# Altium PCB AD9959-pcb.PcbDoc (part 2 of 2)
Units mil, origin at the board's own origin, x right, y up, seen from the top; angles counter-clockwise.
Board outline 3551.25 x 2369.11 mil, 2 copper layers (Top Layer, Bottom Layer); 146 components, 90 nets, 422 pads, 640 vias.
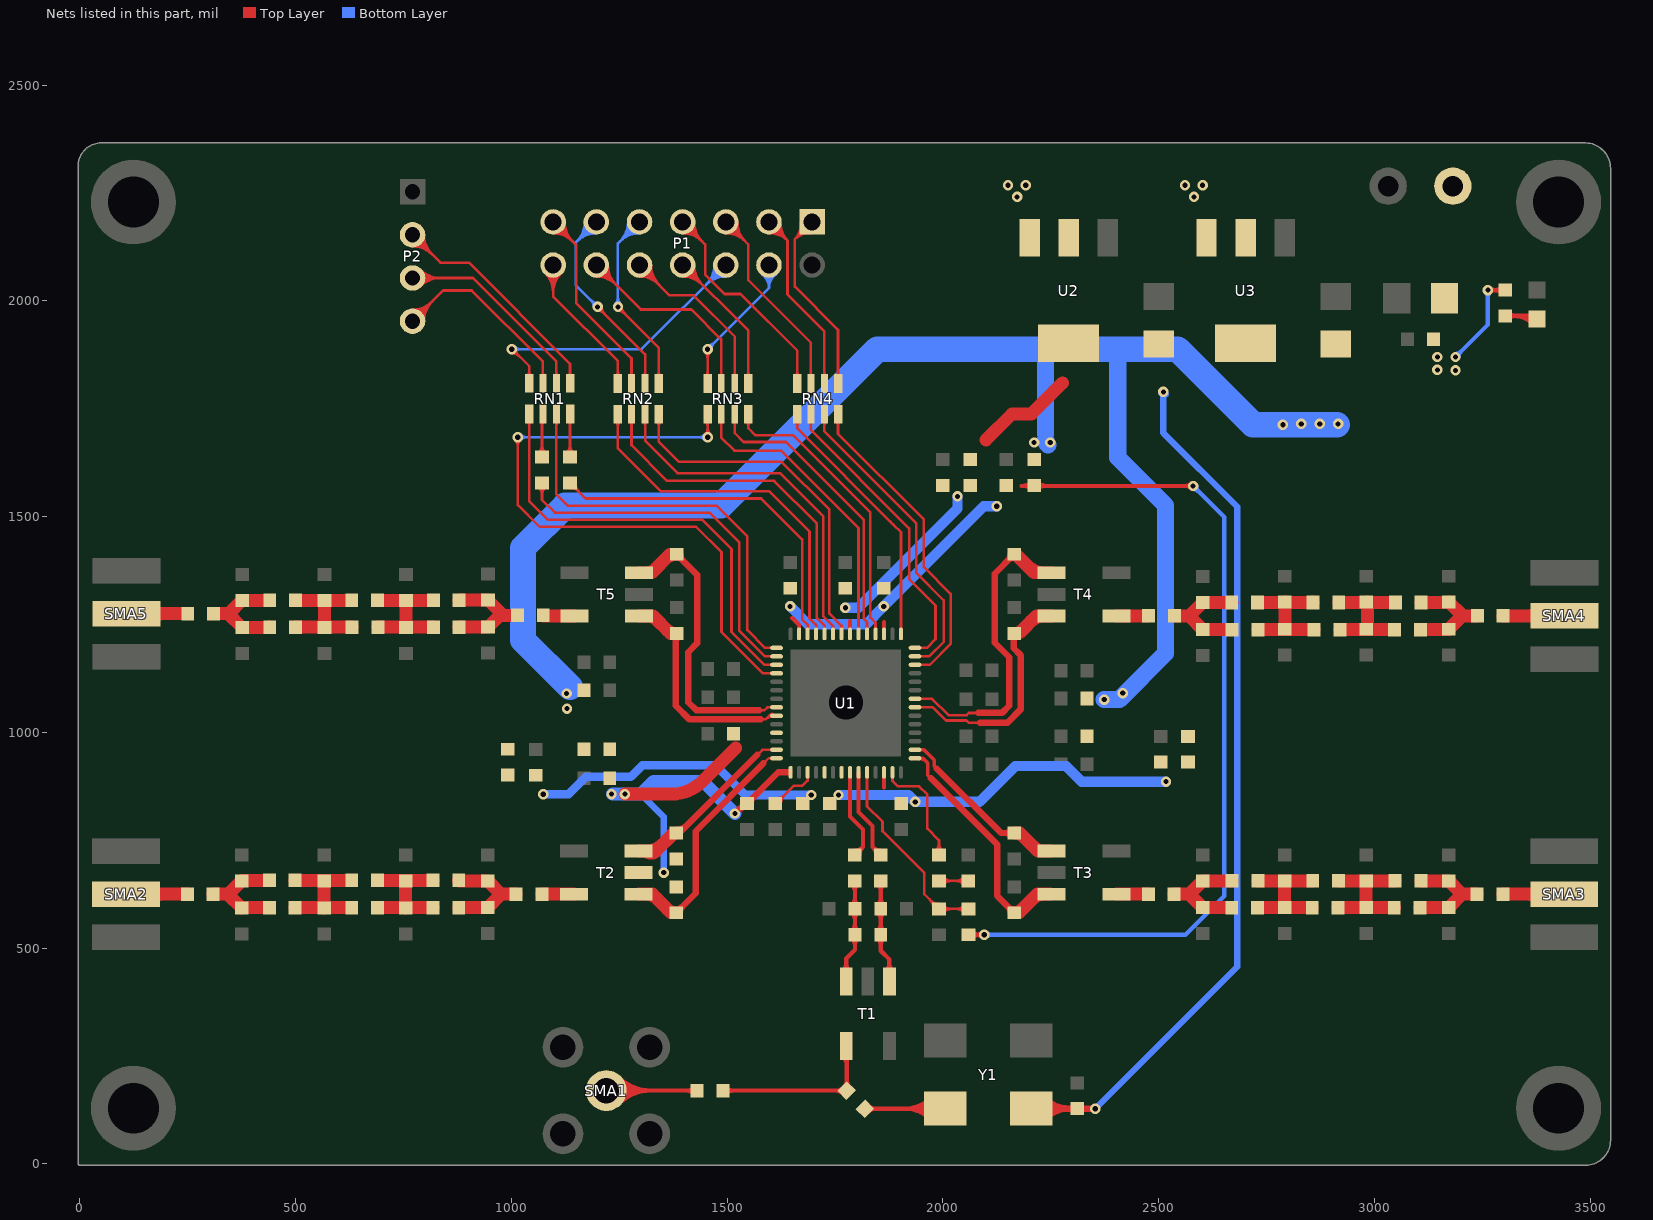
[diagram p2: the nets of this part, all layers, seen from the top]

## Via types
v1: diameter 24, hole 12, Top Layer to Bottom Layer, tented both sides, 640 vias

## Nets (pads, with @x,y where several pads share a name; then routed paths per layer and width w, separated by ;. In a path a pad name is that pad's centre, name@x,y a point inside that pad or via, vN(x,y) a via of type N, cw(c..) or ccw(c..) an arc to the next point about the centre after c; other vN are vias at no path point) (continued)
AVDD3: C68.1 C69.1 C76.1 R23.1 R31.1 R32.1 T2.2 U1.11 U1.15 | length 1049.8
  Top Layer w10: U1.15@1642.43,907.57 U1.15@1647.05,907.57
  Top Layer w15: v1(1518,812) 1540.92,834.92 C69.1@1546,834.92 1618.65,907.57 U1.15@1642.43,907.57 ; v1@1525.15,819.15 cw(c1545.21,799.09) C69.1@1545.21,827.46 ; C69.1@1546.79,842.38 ccw(c1546.79,858.49) C69.1@1558.18,847.1 ; C69.1@1554.25,834.92 cw(c1574.16,834.92) C69.1@1560.08,849
  Top Layer w30: v1(1263,857) 1371.58,857 ccw(c1371.58,957) 1442.29,886.29 1520,964
  Bottom Layer w15: v1(1232,857) 1234,857 v1@1234,858 ; 1300,857 1353,804 v1(1353,675)
  Bottom Layer w30: v1@1234,857 v1(1263,857) 1300,857 1329,886 1444,886 v1(1518,812)
BG_VDD: C67.1 C74.1 R19.1 U1.19 | length 677.5
  Bottom Layer w20: v1(1074,856.49) 1132.49,856.49 1173,897 1277,897 1304,924 1473,924 1542,855 v1(1695,855)
CH0_OUT: R25.2 T3.3 U1.30 | length 501.1
  Top Layer w8: U1.30@1935.43,959.73 1956.27,959.73 1980,936 1980,922 1986.07,915.93 ; R25.2@2165,766.84 R25.2@2178.16,766.84 ; T3.3@2248.26,725 T3.3@2252,725
  Top Layer w15: 1986.07,915.93 2135.16,766.84 R25.2@2165,766.84 ; R25.2@2158.94,761.57 ccw(c2146.2,748.83) 2146.2,766.84 ccw(c2146.2,784.85) R25.2@2158.94,772.12
  Top Layer w30: R25.2@2165.79,766.88 cw(c2165.79,737.11) 2186.84,758.16 ; R25.2@2178.16,766.84 2220,725 T3.3@2248.26,725 ; 2209.83,735.17 ccw(c2234.48,759.82) T3.3@2234.48,724.96
CH0_OUTN: R26.2 T3.1 U1.29 | length 703.4
  Top Layer w8: U1.29@1935.43,940.05 1953.95,940.05 1965,929 1965,901 1971.94,894.06 ; U1.29@1945.28,939.13 cw(c1945.28,915.95) 1961.66,932.34 ; U1.29@1945.51,939.16 cw(c1948.9,926.32) 1958.29,935.71 ; T3.1@2249.34,625 T3.1@2252,625
  Top Layer w15: 1971.94,894.06 2126.04,739.96 2126.04,621.04 R26.2@2165,582.08 ; R26.2@2150.92,596.16 cw(c2136.84,582.08) R26.2@2156.75,582.08 ; R26.2@2152.82,594.26 ccw(c2164.21,605.65) R26.2@2164.21,589.54
  Top Layer w30: R26.2@2165,582.08 2175.92,582.08 2218.84,625 T3.1@2249.34,625 ; R26.2@2165.79,582.04 ccw(c2165.79,606.41) 2183.02,589.18 ; 2207.85,614.01 cw(c2234.48,587.38) 2234.48,625.04 ccw(c2230.64,597.57) 2211.02,617.18
CH1_OUT: R27.2 T4.3 U1.36 | length 806.8
  Top Layer w6: U1.36@1935.43,1077.84 1975.16,1077.84 2013,1040 2055,1040 2060,1045 2082,1045 2079,1048
  Top Layer w15: 2082,1045 2137,1045 2154,1062 2154,1174 2120,1208 2120,1367.84 R27.2@2165,1412.84 ; R27.2@2150.92,1398.76 ccw(c2136.84,1412.84) R27.2@2156.75,1412.84 ; R27.2@2152.82,1400.66 cw(c2164.21,1389.27) R27.2@2164.21,1405.38
  Top Layer w30: R27.2@2165,1412.84 2169.16,1412.84 2212,1370 T4.3@2252,1370 ; 2196.17,1385.83 ccw(c2234.48,1424.14) T4.3@2234.48,1369.96
CH1_OUTN: R28.2 T4.1 U1.35 | length 681.3
  Top Layer w6: U1.35@1935.43,1058.16 1976.84,1058.16 2007.5,1027.5 2054.5,1027.5 2060,1022 2102,1022
  Top Layer w15: 2086,1022 2102,1022 2149,1022 2181,1054 2181,1178 2164,1195 2164,1217 2178,1231 R28.2@2178,1229.16 ; R28.2@2158.94,1223.88 cw(c2146.71,1211.66) 2164,1211.66 ; 2164,1210.63 cw(c2182.74,1210.63) R28.2@2169.49,1223.88
  Top Layer w30: R28.2@2165.79,1229.12 ccw(c2165.79,1254.06) 2183.42,1236.42 ; R28.2@2178,1231 2217,1270 T4.1@2252,1270 ; 2204.71,1257.71 cw(c2234.48,1227.93) 2234.48,1270.04 ccw(c2230.18,1239.34) 2208.26,1261.26
CH2_OUT: R29.2 T5.1 U1.8 | length 768.8
  Top Layer w6: 1575,1051 1586,1051 1593.16,1058.16 U1.8@1614.57,1058.16
  Top Layer w15: R29.2@1382.95,1412.84 1431,1364.79 1431,1207 1410,1186 1410,1070 1429,1051 1575,1051 ; R29.2@1383.74,1405.38 cw(c1383.74,1389.27) R29.2@1395.13,1400.66 ; R29.2@1391.2,1412.84 ccw(c1411.11,1412.84) R29.2@1397.03,1398.76
  Top Layer w30: T5.1@1295.95,1370 1325,1370 1367.84,1412.84 R29.2@1382.95,1412.84 ; T5.1@1313.47,1369.96 ccw(c1313.47,1397.7) 1333.09,1378.09 ; 1357.78,1402.78 cw(c1382.16,1378.41) R29.2@1382.16,1412.88
CH2_OUTN: R30.2 T5.3 U1.9 | length 653.7
  Top Layer w6: R30.2@1375.9,1222.1 1381,1227.21 R30.2@1382.95,1229.16 ; 1578,1030 1589,1030 1597.47,1038.47 U1.9@1614.57,1038.47 ; 1589.06,1030.07 cw(c1604.72,1014.41) U1.9@1604.72,1036.55 ; 1593.85,1034.85 cw(c1600.26,1028.44) U1.9@1603.94,1036.72 ; 1599.31,1040.31 cw(c1604.72,1034.89) U1.9@1604.72,1042.55
  Top Layer w15: R30.2@1376.89,1223.88 cw(c1366.96,1213.95) 1381,1213.95 ; 1381,1208.34 cw(c1402.98,1208.34) R30.2@1387.44,1223.88 ; R30.2@1381,1227.21 1381,1062 1413,1030 1543,1030 ; 1552,1030 1543,1030 ; 1578,1030 1543,1030
  Top Layer w30: T5.3@1295.95,1270 1328,1270 1368.84,1229.16 R30.2@1382.95,1229.16 ; T5.3@1313.47,1270.04 cw(c1313.47,1235.05) 1338.21,1259.79 ; 1359.49,1238.51 ccw(c1382.16,1261.18) R30.2@1382.16,1229.12
CH3_OUT: R31.2 T2.1 U1.13 | length 501.7
  Top Layer w6: 1570,948 1581.73,959.73 U1.13@1614.57,959.73
  Top Layer w15: R31.2@1382.08,766.84 1388.84,766.84 1570,948 ; R31.2@1382.87,774.3 ccw(c1382.87,806.74) 1405.8,783.8
  Top Layer w30: T2.1@1295.08,725 1335,725 ; T2.1@1312.57,724.97 ccw(c1323.77,736.23) 1335,725 ; T2.1@1312.6,724.96 ccw(c1312.6,778.95) 1350.77,740.77 ; R31.2@1375,765 1335,725
CH3_OUTN: R32.2 T2.3 U1.14 | length 634.9
  Top Layer w6: 1584,928 1596.05,940.05 U1.14@1614.57,940.05
  Top Layer w15: R32.2@1382.08,582.08 1427,627 1427,771 1584,928 ; R32.2@1382.87,589.54 ccw(c1382.87,605.65) R32.2@1394.26,594.26 ; R32.2@1390.33,582.08 cw(c1410.24,582.08) R32.2@1396.16,596.16
  Top Layer w30: T2.3@1295.08,625 1327,625 R32.2@1370,582 ; T2.3@1312.6,625.04 cw(c1312.6,590.37) 1337.12,614.88 ; 1361.95,590.05 ccw(c1381.29,609.39) R32.2@1381.29,582.04
CLK_MODE: R3.2 R4.2 U1.24 | length 603.1
  Top Layer w6: U1.24@1824.21,907.57 1824.21,828.79 1860,793 1860,771 1957,674 1957,624.92 R4.2@1991,590.92 R3.2@2059.46,590.92 ; 1969.24,612.68 cw(c1947.48,590.92) R4.2@1978.25,590.92 ; 1971.14,610.78 ccw(c1990.21,629.86) R4.2@1990.21,602.88 ; R4.2@1979.48,602.44 cw(c1967.96,590.92) R4.2@1984.25,590.92 ; R4.2@2000.24,582.46 cw(c2020.66,562.05) 2020.66,590.92 cw(c2020.66,619.8) R4.2@2000.24,599.38 ; R3.2@2050.22,582.46 ccw(c2029.8,562.05) 2029.8,590.92 ccw(c2029.8,619.8) R3.2@2050.22,599.38
CLK_VDD: C65.1 C66.1 C72.1 R17.1 U1.21 U1.26 | length 893
  Top Layer w10: 1863.58,872.42 U1.26@1863.58,907.57
  Bottom Layer w24: v1(1758,855) 1920,855 v1(1936,839) ; 1897.37,855 cw(c1897.37,800.37) v1(1936,839) ; v1(2517,886) 2485,886 2322,886 2286,922 2168,922 2085,839 v1(1936,839)
CSN: RN3.3 U1.47 | length 712
  Top Layer w6: RN3.3@1514.26,1720.34 cw(c1505.94,1712.02) 1517.71,1712.02 cw(c1529.48,1712.02) RN3.3@1521.16,1720.34 ; RN3.3@1517.71,1737.57 1517.71,1693.29 1538,1673 1636,1673 1817,1492 1817,1263 1824.21,1255.79 U1.47@1824.21,1228.43
CSNN: P1.10 RN3.6 | length 650.2
  Top Layer w6: P1.10@1297,2056.47 cw(c1297,1992.43) 1342.29,2037.71 cw(c1387.57,2083) P1.10@1323.53,2083 ; P1.10@1297,2062.47 cw(c1297,2012.91) 1332.04,2047.96 cw(c1367.09,2083) P1.10@1317.53,2083 ; P1.10@1297,2068.47 cw(c1297,2033.4) 1321.8,2058.2 cw(c1346.6,2083) P1.10@1311.53,2083 ; P1.10@1297,2083 1367,2013 1422,2013 1517.71,1917.29 RN3.6@1517.71,1808.43 ; RN3.6@1514.26,1825.66 ccw(c1505.94,1833.98) 1517.71,1833.98 ccw(c1529.48,1833.98) RN3.6@1521.16,1825.66
DVDD: C58.1 C59.1 C73.1 R3.1 R18.1 U1.45 U1.55 | length 2906.4
  Top Layer w10: 1651,1265 1666.73,1249.27 U1.55@1666.73,1228.43 ; U1.45@1863.58,1228.43 1863.58,1255.58 ; R3.1@2059.46,531.08 v1(2095.92,531.08) ; R3.1@2067.3,524.04 cw(c2084.3,507.03) 2084.3,531.08 cw(c2084.3,555.13) R3.1@2067.3,538.12 ; v1@2090.97,526.13 ccw(c2079.02,514.18) 2079.02,531.08 ccw(c2079.02,547.98) v1@2090.97,536.03 ; 2182,1571 v1(2580,1571) ; 2184.56,1571 ccw(c2184.56,1598.73) R18.1@2204.17,1579.12 ; 2189.77,1571 cw(c2189.77,1550.64) R18.1@2204.17,1565.04 ; R18.1@2219.83,1565.04 cw(c2234.23,1550.64) 2234.23,1571 ; R18.1@2219.83,1579.12 ccw(c2239.44,1598.73) 2239.44,1571 ; v1@2575.05,1566.05 ccw(c2563.1,1554.1) 2563.1,1571 ccw(c2563.1,1587.9) v1@2575.05,1575.95
  Bottom Layer w10: v1(2095.92,531.08) 2562.08,531.08 2652,621 2652,1499 v1(2580,1571) ; v1@2100.87,526.13 cw(c2112.82,514.18) 2112.82,531.08 cw(c2112.82,547.98) v1@2100.87,536.03 ; v1@2580,1564 cw(c2580,1547.1) 2591.95,1559.05 cw(c2603.9,1571) v1@2587,1571
  Bottom Layer w24: v1(1646,1292) 1687,1251 1822,1251 v1(1863,1292) 2095,1524 v1(2125,1524)
DVDD/IO: C57.1 C64.1 R24.1 U1.49 | length 413
  Top Layer w10: U1.49@1784.84,1228.43 1784.84,1258.16
  Bottom Layer w24: v1(1774,1289) 1776,1289 1804,1289 2034,1519 v1(2034,1547)
I/O-UPDATA: RN3.4 U1.46 | length 708.7
  Top Layer w6: RN3.4@1544.37,1720.92 cw(c1532.69,1709.24) 1549.2,1709.24 cw(c1565.72,1709.24) RN3.4@1554.04,1720.92 ; RN3.4@1549.2,1737.57 1549.2,1704.8 1565,1689 1653,1689 1832,1510 1832,1266 1843.9,1254.1 U1.46@1843.9,1228.43
NetC1_1: C1.1 R2.2 | length 158.3
  Top Layer w6: R2.2@1991,656 C1.1@2058.56,656 ; R2.2@2000.24,647.54 cw(c2020.66,627.12) 2020.66,656 cw(c2020.66,684.88) R2.2@2000.24,664.46 ; C1.1@2049.31,647.54 ccw(c2028.9,627.12) 2028.9,656 ccw(c2028.9,684.88) C1.1@2049.31,664.46
NetC3_1: C3.1 R5.1 R7.2 T1.1 | length 467.9
  Top Layer w10: R7.2@1848.96,523.25 cw(c1831.95,506.24) 1856,506.24 cw(c1880.05,506.24) R7.2@1863.04,523.25 ; R7.2@1848.96,538.91 ccw(c1831.95,555.91) 1856,555.91 ccw(c1880.05,555.91) R7.2@1863.04,538.91 ; R5.1@1848.96,583.09 cw(c1831.95,566.09) 1856,566.09 cw(c1880.05,566.09) R5.1@1863.04,583.09 ; R5.1@1848.96,598.75 ccw(c1831.95,615.76) 1856,615.76 ccw(c1880.05,615.76) R5.1@1863.04,598.75 ; C3.1@1848.96,648.96 cw(c1831.95,631.95) 1856,631.95 cw(c1880.05,631.95) C3.1@1863.04,648.96 ; C3.1@1856,656 R5.1@1856,590.92 R7.2@1856,531.08 1856,494 1876,474 T1.1@1876,423 ; T1.1@1868.96,447.56 ccw(c1851.95,464.57) 1876,464.57 ccw(c1900.05,464.57) T1.1@1883.04,447.56
NetC4_1: C4.1 R7.1 R9.2 T1.3 | length 468.1
  Top Layer w10: T1.3@1768.96,447.56 ccw(c1751.95,464.57) 1776,464.57 ccw(c1800.05,464.57) T1.3@1783.04,447.56 ; T1.3@1776,423 1776,476 1796.16,496.16 R7.1@1796.16,531.08 C4.1@1796.16,655.84 ; R9.2@1788.96,583.09 cw(c1771.57,565.71) 1796.16,565.71 ; R9.2@1788.96,598.75 ccw(c1771.57,616.14) 1796.16,616.14 ; C4.1@1788.96,648.96 cw(c1771.57,631.57) 1796.16,631.57 ; R7.1@1789.11,523.25 cw(c1772.11,506.24) 1796.16,506.24 cw(c1820.2,506.24) R7.1@1803.2,523.25 ; R7.1@1789.11,538.91 ccw(c1772.11,555.91) 1796.16,555.91 ccw(c1820.2,555.91) R7.1@1803.2,538.91 ; 1796.16,566.47 cw(c1819.67,566.47) R9.2@1803.04,583.09 ; 1796.16,615.38 ccw(c1819.67,615.38) R9.2@1803.04,598.75 ; 1796.16,632.33 cw(c1819.67,632.33) C4.1@1803.04,648.96
  Top Layer w15: C4.1@1796,656 C4.1@1796.16,655.84
NetC5_2: C5.2 C9.1 C13.1 L2.1 R12.2 | length 257.3
  Top Layer w30: L2.1@878,657 878.92,656.08 C13.1@945.08,656.08 976.16,625 ; C9.1@878.08,594 878.16,593.92 C5.2@945.08,593.92 976.16,625 ; R12.2@1011.08,625 976.16,625
NetC6_2: C6.2 C9.2 C12.1 C14.2 L1.1 L2.2 | length 319.5
  Top Layer w30: L1.1@690,594 C14.2@755.08,594 ; C12.1@690,657 L2.2@818.16,657 ; C14.2@755.08,593 C14.2@755.08,594 ; C6.2@755.08,656.08 C14.2@755.08,594 ; C9.2@818.24,594 C14.2@755.08,594
NetC7_2: C7.2 C10.1 C12.2 C15.2 L1.2 L3.1 | length 325.4
  Top Layer w30: C10.1@499,594 C15.2@566.08,594 ; L3.1@499,657 C12.2@630.16,657 ; C15.2@566.08,593 C15.2@566.08,594 ; C7.2@566.08,656.08 C15.2@566.08,594 ; L1.2@630.16,594 C15.2@566.08,594
NetC8_2: C8.2 C10.2 C11.1 C16.2 L3.2 | length 252.2
  Top Layer w30: C11.1@309,625 343.08,625 C8.2@375.08,593 376.08,594 C10.2@439.16,594 ; 344,625 C16.2@375.08,656.08 376,657 L3.2@439.16,657
NetC11_2: C11.2 SMA2.1 | length 197.2
  Top Layer w30: SMA2.1@107.08,625 C11.2@249.16,625 ; SMA2.1@166.56,614.73 cw(c191.36,589.93) 191.36,625 cw(c191.36,660.07) SMA2.1@166.56,635.27
NetC17_2: C17.2 C21.1 C25.1 L5.1 R13.2 | length 258.4
  Top Layer w30: R13.2@2536,625 2570.92,625 ; L5.1@2669.49,594 2669.41,593.92 C25.1@2602,593.92 2570.92,625 ; C21.1@2670,656 2669.92,656.08 C17.2@2602,656.08 2570.92,625
NetC18_2: C18.2 C21.2 C24.1 C26.2 L4.1 L5.2 | length 316.1
  Top Layer w30: L5.2@2729.33,594 C18.2@2792,594 ; C21.2@2729.84,656 C26.2@2792,656 ; C18.2@2792,593.92 C18.2@2792,594 ; C26.2@2792,656.08 C26.2@2792,656 ; C24.1@2856,594 C18.2@2792,594 ; L4.1@2857.08,656 C26.2@2792,656 ; C18.2@2792,594 C26.2@2792,656
NetC19_2: C19.2 C22.1 C24.2 C27.2 L4.2 L6.1 | length 323.6
  Top Layer w30: C24.2@2915.84,594 C19.2@2981,594 ; L4.2@2916.92,656 2980.92,656 C27.2@2981,656.08 ; C19.2@2981,593.92 C19.2@2981,594 ; L6.1@3046.08,594 C19.2@2981,594 ; C22.1@3048.08,656 2981.08,656 C27.2@2981,656.08 ; C19.2@2981,594 C27.2@2981,656.08
NetC20_2: C20.2 C22.2 C23.1 C28.2 L6.2 | length 253.1
  Top Layer w30: L6.2@3105.92,594 3171.92,594 C28.2@3172,593.92 3203.08,625 ; C22.2@3107.92,656 3171.92,656 C20.2@3172,656.08 3203.08,625 ; C23.1@3238.08,625 3203.08,625
NetC23_2: C23.2 SMA3.1 | length 197.2
  Top Layer w30: C23.2@3297.92,625 SMA3.1@3440,625 ; SMA3.1@3380.51,614.73 ccw(c3355.71,589.93) 3355.71,625 ccw(c3355.71,660.07) SMA3.1@3380.51,635.27
NetC29_2: C29.2 C33.1 C37.1 L8.1 R14.2 | length 257.1
  Top Layer w30: R14.2@2536.51,1270 2570.51,1270 C37.1@2602.51,1238 2668,1238 L8.1@2669,1239 ; 2571.43,1270 C29.2@2602.51,1301.08 2669.43,1301.08 C33.1@2669.51,1301
NetC30_2: C30.2 C33.2 C36.1 C38.2 L7.1 L8.2 | length 325.5
  Top Layer w30: C33.2@2729.35,1301 L7.1@2857.59,1301 L7.1@2856.59,1302 ; L8.2@2729.92,1238 C36.1@2860,1238 ; C38.2@2791.51,1301 C38.2@2792.51,1302 C30.2@2792.51,1238.92 C30.2@2791.59,1238
NetC31_2: C31.2 C34.1 C36.2 C39.2 L7.2 L9.1 | length 313.6
  Top Layer w30: L7.2@2917.43,1301 C34.1@3048.59,1301 ; C36.2@2919.84,1238 L9.1@3038.51,1238 ; C39.2@2982.51,1302 2983.51,1301 2983.51,1239.92 C31.2@2982.59,1239
NetC32_2: C32.2 C34.2 C35.1 C40.2 L9.2 | length 255.2
  Top Layer w30: L9.2@3106.43,1238 3171.59,1238 C40.2@3172.51,1238.92 3203.59,1270 3204.51,1270 ; C34.2@3108.43,1301 3171.51,1301 C32.2@3172.51,1302 3204.51,1270 ; C35.1@3238.59,1270 3204.51,1270
NetC35_2: C35.2 SMA4.1 | length 197.2
  Top Layer w30: C35.2@3298.43,1270 SMA4.1@3440.51,1270 ; SMA4.1@3381.03,1259.73 ccw(c3356.23,1234.93) 3356.23,1270 ccw(c3356.23,1305.07) SMA4.1@3381.03,1280.27
NetC41_2: C41.2 C45.1 C49.1 L11.1 R15.2 | length 264.7
  Top Layer w30: C45.1@878.95,1244 879.03,1243.92 C41.2@945.95,1243.92 973.03,1271 981.95,1271 ; L11.1@879,1306 880,1307 C49.1@945.95,1307 981.95,1271 ; R15.2@1014.08,1271 981.95,1271
NetC42_2: C42.2 C45.2 C48.1 C50.2 L10.1 L11.2 | length 320.5
  Top Layer w30: C48.1@690,1306 C42.2@755.95,1306 ; L10.1@690.87,1244 C50.2@755.95,1244 ; C50.2@755.95,1243 C50.2@755.95,1244 ; C42.2@755.95,1306.08 C42.2@755.95,1306 ; C45.2@819.11,1244 C50.2@755.95,1244 ; L11.2@819.16,1306 C42.2@755.95,1306 ; C50.2@755.95,1244 C42.2@755.95,1306
NetC43_2: C43.2 C46.1 C48.2 C51.2 L10.2 L12.1 | length 324.4
  Top Layer w30: C46.1@499.87,1244 C51.2@566.95,1244 ; L12.1@500,1306 C43.2@566.95,1306 ; C51.2@566.95,1243 C51.2@566.95,1244 ; C43.2@566.95,1306.08 C43.2@566.95,1306 ; C48.2@630.16,1306 C43.2@566.95,1306 ; L10.2@631.03,1244 C51.2@566.95,1244 ; C51.2@566.95,1244 C43.2@566.95,1306
NetC44_2: C44.2 C46.2 C47.1 C52.2 L12.2 | length 252
  Top Layer w30: C47.1@309.87,1275 343.95,1275 C44.2@375.95,1243 439.03,1243 C46.2@440.03,1244 ; 344.87,1275 C52.2@375.95,1306.08 440.08,1306.08 L12.2@440.16,1306
NetC47_2: C47.2 SMA5.1 | length 197.2
  Top Layer w30: SMA5.1@107.95,1275 C47.2@250.03,1275 ; SMA5.1@167.43,1264.73 cw(c192.23,1239.93) 192.23,1275 cw(c192.23,1310.07) SMA5.1@167.43,1285.27
NetD1_1: D1.1 R16.1 | length 189.1
  Top Layer w10: R16.1@3303,1965.16 D1.1@3369.38,1965.16 ; R16.1@3310.83,1958.11 cw(c3327.83,1941.11) 3327.83,1965.16 cw(c3327.83,1989.2) R16.1@3310.83,1972.2 ; 3323.87,1965.16 cw(c3323.87,1905.43) D1.1@3366.1,1947.66 ; 3348.01,1965.16 cw(c3348.01,1929.57) D1.1@3373.18,1954.73
  Top Layer w15: D1.1@3369.38,1965.16 D1.1@3376.49,1958.05
NetR1_2: R1.2 U1.17 | length 161.1
  Top Layer w6: R1.2@1612,834.92 1612.92,834.92 1654,876 1674,876 1686.42,888.42 U1.17@1686.42,907.57 ; R1.2@1612.79,846.88 ccw(c1612.79,876.08) 1633.43,855.43 ; R1.2@1624.75,834.92 cw(c1653.3,834.92) 1633.11,855.11
NetR2_1: R2.1 U1.27 | length 310.4
  Top Layer w6: U1.27@1883.27,907.57 1883.27,887.73 1896,875 1945,875 1964,856 1964,777 1991,750 R2.1@1991,715.84 ; R2.1@1982.54,724.3 ccw(c1962.12,744.72) 1991,744.72 ccw(c2019.88,744.72) R2.1@1999.46,724.3
NetR6_1: R6.1 Y1.3 | length 446.3
  Top Layer w10: R6.1@1819.63,128 Y1.3@2005,128 ; R6.1@1826.92,121.2 cw(c1843.34,104.78) 1843.34,128 ; R6.1@1826.92,135.28 ccw(c1844.5,152.87) 1844.5,128 ; Y1.3@1970.85,103.7 ccw(c1912.18,45.02) 1912.18,128 ccw(c1912.18,210.98) Y1.3@1970.85,152.3 ; Y1.3@1977.93,110.77 ccw(c1936.32,69.17) 1936.32,128 ccw(c1936.32,186.83) Y1.3@1977.93,145.23
  Top Layer w15: R6.1@1819.32,127.68 R6.1@1819.63,128
NetR6_2: R6.2 R8.2 T1.4 | length 541.5
  Top Layer w10: R8.2@1490,170 R6.2@1777,170 T1.4@1777,272 ; R8.2@1497.04,162.96 cw(c1514.05,145.95) 1514.05,170 cw(c1514.05,194.05) R8.2@1497.04,177.04 ; 1751.05,170 cw(c1751.05,144.05) R6.2@1769.4,162.4 ; 1753.74,170 ccw(c1753.74,192.15) R6.2@1769.4,176.49 ; T1.4@1768.96,248.44 cw(c1749.54,229.02) 1777,229.02 ; R6.2@1770.51,177.6 ccw(c1754.85,193.26) 1777,193.26 ; 1777,195.95 ccw(c1802.95,195.95) R6.2@1784.6,177.6 ; 1777,233.85 cw(c1797.63,233.85) T1.4@1783.04,248.44
  Top Layer w15: T1.4@1776,273 T1.4@1777,272
NetR8_1: R8.1 SMA1.1 | length 614.8
  Top Layer w10: SMA1.1@1220,170 R8.1@1430.16,170 ; SMA1.1@1235.73,154.27 cw(c1273.7,116.3) 1273.7,170 cw(c1273.7,223.7) SMA1.1@1235.73,185.73 ; SMA1.1@1242.8,147.2 cw(c1297.84,92.16) 1297.84,170 cw(c1297.84,247.84) SMA1.1@1242.8,192.8 ; SMA1.1@1249.87,140.13 cw(c1321.99,68.01) 1321.99,170 cw(c1321.99,271.99) SMA1.1@1249.87,199.87 ; R8.1@1423.11,162.96 ccw(c1406.11,145.95) 1406.11,170 ccw(c1406.11,194.05) R8.1@1423.11,177.04
NetR12_1: R12.1 T2.6 | length 74.2
  Top Layer w30: R12.1@1070.92,625 T2.6@1145.08,625
NetR13_1: R13.1 T3.4 | length 74.2
  Top Layer w30: T3.4@2402,625 R13.1@2476.16,625
NetR14_1: R14.1 T4.4 | length 74.7
  Top Layer w30: T4.4@2402,1270 R14.1@2476.67,1270
NetR15_1: R15.1 T5.6 | length 72.4
  Top Layer w30: R15.1@1073.92,1271 1074.92,1270 T5.6@1145.95,1270
P0: P1.1 RN4.5 | length 650.1
  Top Layer w6: P1.1@1670.58,2180.57 cw(c1623.74,2176.27) 1657,2143 ; P1.1@1676.56,2181.12 cw(c1640.31,2177.79) 1666.05,2152.05 cw(c1691.79,2126.31) P1.1@1695.12,2162.56 ; P1.1@1682.53,2181.67 cw(c1656.88,2179.31) 1675.1,2161.1 cw(c1693.31,2142.88) P1.1@1695.67,2168.53 ; P1.1@1694.57,2156.58 ccw(c1690.27,2109.74) 1657,2143 ; P1.1@1697,2183 1657,2143 ; RN4.5@1752.22,1825.08 ccw(c1740.54,1836.76) 1757.06,1836.76 ccw(c1773.58,1836.76) RN4.5@1761.9,1825.08 ; RN4.5@1757.06,1808.43 1757.06,1932.94 1657,2033 1657,2143
P1: P1.3 RN4.6 | length 661.9
  Top Layer w6: P1.3@1597,2183 1640,2140 ; P1.3@1597.54,2168.48 cw(c1598.69,2137.6) 1620.55,2159.45 cw(c1642.4,2181.31) P1.3@1611.52,2182.46 ; P1.3@1597.77,2162.49 cw(c1599.39,2118.85) 1630.27,2149.73 cw(c1661.15,2180.6) P1.3@1617.51,2182.23 ; P1.3@1597.99,2156.49 cw(c1600.09,2100.1) 1640,2140 ; P1.3@1623.51,2182.01 ccw(c1679.9,2179.9) 1640,2140 ; RN4.6@1722.12,1825.66 ccw(c1713.8,1833.98) 1725.56,1833.98 ccw(c1737.33,1833.98) RN4.6@1729.01,1825.66 ; RN4.6@1725.56,1808.43 1725.56,1929.44 1640,2015 1640,2140
P2: P1.5 RN4.7 | length 708.2
  Top Layer w6: P1.5@1497,2156.47 cw(c1497,2092.43) 1542.29,2137.71 cw(c1587.57,2183) P1.5@1523.53,2183 ; P1.5@1497,2162.47 cw(c1497,2112.91) 1532.04,2147.96 cw(c1567.09,2183) P1.5@1517.53,2183 ; P1.5@1497,2168.47 cw(c1497,2133.4) 1521.8,2158.2 cw(c1546.6,2183) P1.5@1511.53,2183 ; P1.5@1497,2183 1549,2131 1549,2048 1694.07,1902.93 RN4.7@1694.07,1808.43 ; RN4.7@1690.62,1825.66 ccw(c1682.3,1833.98) 1694.07,1833.98 ccw(c1705.83,1833.98) RN4.7@1697.51,1825.66
P3: P1.7 RN4.8 | length 765.7
  Top Layer w6: P1.7@1397,2156.47 cw(c1397,2092.43) 1442.29,2137.71 cw(c1487.57,2183) P1.7@1423.53,2183 ; P1.7@1397,2162.47 cw(c1397,2112.91) 1432.04,2147.96 cw(c1467.09,2183) P1.7@1417.53,2183 ; P1.7@1397,2168.47 cw(c1397,2133.4) 1421.8,2158.2 cw(c1446.6,2183) P1.7@1411.53,2183 ; P1.7@1397,2183 1449,2131 1449,2061 1494,2016 1531,2016 1662.57,1884.43 RN4.8@1662.57,1808.43 ; RN4.8@1657.73,1825.08 ccw(c1646.05,1836.76) 1662.57,1836.76 ccw(c1679.09,1836.76) RN4.8@1667.41,1825.08
P-0: RN4.4 U1.40 | length 769.2
  Top Layer w6: RN4.4@1752.22,1720.92 cw(c1740.54,1709.24) 1757.06,1709.24 cw(c1773.58,1709.24) RN4.4@1761.9,1720.92 ; RN4.4@1757.06,1737.57 1757.06,1691.94 1956,1493 1956,1383 2018,1321 2018,1205 1969.58,1156.58 U1.40@1935.43,1156.58
P-1: RN4.3 U1.41 | length 741.1
  Top Layer w6: RN4.3@1722.12,1720.34 cw(c1713.8,1712.02) 1725.56,1712.02 cw(c1737.33,1712.02) RN4.3@1729.01,1720.34 ; RN4.3@1725.56,1737.57 1725.56,1697.44 1938,1485 1938,1370 2002,1306 2002,1210 1968.27,1176.27 U1.41@1935.43,1176.27
P-2: RN4.2 U1.42 | length 715.6
  Top Layer w6: RN4.2@1690.62,1720.34 cw(c1682.3,1712.02) 1694.07,1712.02 cw(c1705.83,1712.02) RN4.2@1697.51,1720.34 ; RN4.2@1694.07,1737.57 1694.07,1700.93 1922,1473 1922,1355 1983,1294 1983,1216 1962.95,1195.95 U1.42@1935.43,1195.95
P-3: RN4.1 U1.43 | length 646
  Top Layer w6: RN4.1@1657.73,1720.92 cw(c1646.05,1709.24) 1662.57,1709.24 cw(c1679.09,1709.24) RN4.1@1667.41,1720.92 ; RN4.1@1662.57,1737.57 1662.57,1704.43 1886,1481 ; 1878,1489 1886,1481 ; U1.43@1902.95,1228.43 1902.95,1464.05 1886,1481
PD_CTL: P1.4 RN3.8 | length 558.4
  Top Layer w6: v1@1448.35,1881.35 cw(c1432.99,1865.99) 1454.72,1865.99 cw(c1476.44,1865.99) v1@1461.08,1881.35 ; RN3.8@1449.88,1825.08 ccw(c1438.2,1836.76) 1454.72,1836.76 ccw(c1471.24,1836.76) RN3.8@1459.55,1825.08 ; RN3.8@1454.72,1808.43 v1(1454.72,1887.72)
  Bottom Layer w6: v1(1454.72,1887.72) 1597,2030 ; v1@1454.72,1896.72 ccw(c1454.72,1918.44) 1470.08,1903.08 ccw(c1485.44,1887.72) v1@1463.72,1887.72 ; P1.4@1581.1,2061.76 cw(c1557.32,2030) 1597,2030 ; P1.4@1584.7,2066.57 cw(c1566.3,2041.99) 1597,2041.99 cw(c1627.7,2041.99) P1.4@1609.3,2066.57 ; P1.4@1597,2083 1597,2030 ; P1.4@1612.9,2061.76 ccw(c1636.68,2030) 1597,2030
PWR_DWN_CTL: RN3.1 U1.4 | length 1690.3
  Top Layer w6: v1@1008.64,1677.64 cw(c993.27,1662.27) 1015,1662.27 cw(c1036.73,1662.27) v1@1021.36,1677.64 ; v1@1015,1692 v1(1015,1684) 1015,1527 1065.43,1476.57 1428.43,1476.57 1487,1418 1487,1233 1583.1,1136.9 U1.4@1614.57,1136.9 ; v1@1448.64,1690.36 ccw(c1433.96,1705.04) 1454.72,1705.04 ; RN3.1@1449.88,1720.92 cw(c1438.2,1709.24) 1454.72,1709.24 cw(c1471.24,1709.24) RN3.1@1459.55,1720.92 ; v1@1454.72,1684.28 RN3.1@1454.72,1737.57 ; 1454.72,1706.41 ccw(c1477.41,1706.41) v1@1461.36,1690.36
  Bottom Layer w6: v1(1015,1684) v1(1455,1684) ; v1@1021.36,1677.64 cw(c1036.73,1662.27) 1036.73,1684 cw(c1036.73,1705.73) v1@1021.36,1690.36 ; v1@1448.64,1677.64 ccw(c1433.27,1662.27) 1433.27,1684 ccw(c1433.27,1705.73) v1@1448.64,1690.36
REF_CLK: C3.2 U1.23 | length 250.8
  Top Layer w10: U1.23@1804.53,907.57 1804.53,815.47 1836.84,783.16 1836.84,735 C3.2@1856,715.84 ; 1837.65,734.19 cw(c1819.3,715.84) C3.2@1845.25,715.84 ; 1839.55,732.29 ccw(c1855.21,747.95) C3.2@1855.21,725.8
REF_CLKN: C4.2 U1.22 | length 249.9
  Top Layer w10: U1.22@1784.84,907.57 1784.84,805.16 1815,775 1815,734.84 C4.2@1796,715.84 ; C4.2@1796.79,725.8 ccw(c1796.79,747.95) 1812.45,732.29 ; C4.2@1806.75,715.84 cw(c1832.7,715.84) 1814.35,734.19
RESET: RN1.1 U1.3 | length 1070.9
  Top Layer w6: RN1.1@1036.67,1721.35 cw(c1024.99,1709.67) 1041.51,1709.67 cw(c1058.03,1709.67) RN1.1@1046.35,1721.35 ; RN1.1@1041.51,1738 1041.51,1535.49 1084.07,1492.93 1442.07,1492.93 1510.13,1424.87 1510.13,1232.87 1586.42,1156.58 U1.3@1614.57,1156.58
RST: P1.6 RN1.8 | length 1001.4
  Top Layer w6: v1@1001,1879 cw(c1001,1854.86) 1018.07,1871.93 ; v1@1001,1889 1041.51,1848.49 RN1.8@1041.51,1808.87 ; v1@1010,1888 ccw(c1029.31,1888) 1015.66,1874.34 ; RN1.8@1036.67,1825.52 ccw(c1024.99,1837.2) 1041.51,1837.2 ccw(c1058.03,1837.2) RN1.8@1046.35,1825.52
  Bottom Layer w6: v1(1001,1888) 1302,1888 P1.6@1497,2083 ; v1@1007.36,1881.64 cw(c1022.73,1866.27) 1022.73,1888 cw(c1022.73,1909.73) v1@1007.36,1894.36 ; P1.6@1470.47,2083 cw(c1406.43,2083) 1451.71,2037.71 cw(c1497,1992.43) P1.6@1497,2056.47 ; P1.6@1476.47,2083 cw(c1426.91,2083) 1461.96,2047.96 cw(c1497,2012.91) P1.6@1497,2062.47 ; P1.6@1482.47,2083 cw(c1447.4,2083) 1472.2,2058.2 cw(c1497,2033.4) P1.6@1497,2068.47
S_CLK: P1.12 RN3.7 | length 714.9
  Top Layer w6: P1.12@1197,2056.47 cw(c1197,1992.43) 1242.29,2037.71 cw(c1287.57,2083) P1.12@1223.53,2083 ; P1.12@1197,2062.47 cw(c1197,2012.91) 1232.04,2047.96 cw(c1267.09,2083) P1.12@1217.53,2083 ; P1.12@1197,2068.47 cw(c1197,2033.4) 1221.8,2058.2 cw(c1246.6,2083) P1.12@1211.53,2083 ; P1.12@1197,2083 1300,1980 1417,1980 1486.21,1910.79 RN3.7@1486.21,1808.43 ; RN3.7@1482.77,1825.66 ccw(c1474.45,1833.98) 1486.21,1833.98 ccw(c1497.98,1833.98) RN3.7@1489.66,1825.66
SCLK: RN3.2 U1.48 | length 722.7
  Top Layer w6: RN3.2@1482.77,1720.34 cw(c1474.45,1712.02) 1486.21,1712.02 cw(c1497.98,1712.02) RN3.2@1489.66,1720.34 ; RN3.2@1486.21,1737.57 1486.21,1683.79 1517,1653 1625,1653 1804.53,1473.47 U1.48@1804.53,1228.43
SDIO-0: P1.9 RN2.5 | length 762.1
  Top Layer w6: v1@1247,1977 cw(c1247,1955.27) 1262.36,1970.64 cw(c1277.73,1986) v1@1256,1986 ; v1(1247,1986) 1341.35,1891.65 RN2.5@1341.35,1808.43 ; RN2.5@1336.51,1825.08 ccw(c1324.83,1836.76) 1341.35,1836.76 ccw(c1357.87,1836.76) RN2.5@1346.19,1825.08
  Bottom Layer w6: v1@1240.64,1992.36 ccw(c1225.27,2007.73) 1247,2007.73 ccw(c1268.73,2007.73) v1@1253.36,1992.36 ; v1(1247,1986) 1247,2133 P1.9@1297,2183 ; P1.9@1270.47,2183 cw(c1206.43,2183) 1251.71,2137.71 cw(c1297,2092.43) P1.9@1297,2156.47 ; P1.9@1276.47,2183 cw(c1226.91,2183) 1261.96,2147.96 cw(c1297,2112.91) P1.9@1297,2162.47 ; P1.9@1282.47,2183 cw(c1247.4,2183) 1272.2,2158.2 cw(c1297,2133.4) P1.9@1297,2168.47
SDIO-1: P1.11 RN2.6 | length 781.4
  Top Layer w6: v1@1200,1977 cw(c1200,1955.27) 1215.36,1970.64 cw(c1230.73,1986) v1@1209,1986 ; v1(1200,1986) 1309.85,1876.15 RN2.6@1309.85,1808.43 ; RN2.6@1306.41,1825.66 ccw(c1298.09,1833.98) 1309.85,1833.98 ccw(c1321.62,1833.98) RN2.6@1313.3,1825.66
  Bottom Layer w6: P1.11@1170.47,2183 cw(c1106.43,2183) 1151.71,2137.71 cw(c1197,2092.43) P1.11@1197,2156.47 ; P1.11@1176.47,2183 cw(c1126.91,2183) 1161.96,2147.96 cw(c1197,2112.91) P1.11@1197,2162.47 ; P1.11@1182.47,2183 cw(c1147.4,2183) 1172.2,2158.2 cw(c1197,2133.4) P1.11@1197,2168.47 ; v1@1191,1986 ccw(c1169.27,1986) 1184.64,2001.36 ccw(c1200,2016.73) v1@1200,1995 ; P1.11@1197,2183 1149,2135 1149,2037 v1(1200,1986)
SDIO-2: P1.13 RN2.7 | length 701.7
  Top Layer w6: P1.13@1097,2156.47 cw(c1097,2092.43) 1142.29,2137.71 cw(c1187.57,2183) P1.13@1123.53,2183 ; P1.13@1097,2162.47 cw(c1097,2112.91) 1132.04,2147.96 cw(c1167.09,2183) P1.13@1117.53,2183 ; P1.13@1097,2168.47 cw(c1097,2133.4) 1121.8,2158.2 cw(c1146.6,2183) P1.13@1111.53,2183 ; P1.13@1097,2183 1150,2130 1150,1995 1278.36,1866.64 RN2.7@1278.36,1808.43 ; RN2.7@1274.91,1825.66 ccw(c1266.59,1833.98) 1278.36,1833.98 ccw(c1290.13,1833.98) RN2.7@1281.8,1825.66
SDIO-3: P1.14 RN2.8 | length 596.1
  Top Layer w6: P1.14@1078.24,2064.24 cw(c1032.96,2018.96) 1097,2018.96 cw(c1161.04,2018.96) P1.14@1115.76,2064.24 ; P1.14@1082.48,2068.48 cw(c1047.44,2033.44) 1097,2033.44 cw(c1146.56,2033.44) P1.14@1111.52,2068.48 ; P1.14@1086.73,2072.73 cw(c1061.93,2047.93) 1097,2047.93 cw(c1132.07,2047.93) P1.14@1107.27,2072.73 ; P1.14@1097,2083 1097,2010 1246.86,1860.14 RN2.8@1246.86,1808.43 ; RN2.8@1242.02,1825.08 ccw(c1230.34,1836.76) 1246.86,1836.76 ccw(c1263.38,1836.76) RN2.8@1251.7,1825.08
SDIO_0: RN2.4 U1.50 | length 849.5
  Top Layer w6: RN2.4@1336.51,1720.92 cw(c1324.83,1709.24) 1341.35,1709.24 cw(c1357.87,1709.24) RN2.4@1346.19,1720.92 ; RN2.4@1341.35,1737.57 1341.35,1674.65 1389,1627 1626,1627 1737,1516 1737,1275 1765.16,1246.84 U1.50@1765.16,1228.43
SDIO_1: RN2.3 U1.51 | length 846.9
  Top Layer w6: RN2.3@1306.41,1720.34 cw(c1298.09,1712.02) 1309.85,1712.02 cw(c1321.62,1712.02) RN2.3@1313.3,1720.34 ; RN2.3@1309.85,1737.57 1309.85,1676.15 1385,1601 1622,1601 1723,1500 1723,1269 1745.47,1246.53 U1.51@1745.47,1228.43
SDIO_2: RN2.2 U1.52 | length 858.2
  Top Layer w6: RN2.2@1274.91,1720.34 cw(c1266.59,1712.02) 1278.36,1712.02 cw(c1290.13,1712.02) RN2.2@1281.8,1720.34 ; RN2.2@1278.36,1737.57 1278.36,1665.64 1361,1583 1609,1583 1708,1484 1708,1265 1725.79,1247.21 U1.52@1725.79,1228.43
SDIO_3: RN2.1 U1.53 | length 872.3
  Top Layer w6: RN2.1@1242.02,1720.92 cw(c1230.34,1709.24) 1246.86,1709.24 cw(c1263.38,1709.24) RN2.1@1251.7,1720.92 ; RN2.1@1246.86,1737.57 1246.86,1658.14 1346,1559 1597,1559 1691,1465 1691,1264 1706.1,1248.9 U1.53@1706.1,1228.43
SY_CLK: P2.2 RN1.5 | length 793.5
  Top Layer w6: P2.2@771,2126.47 cw(c771,2062.43) 816.29,2107.71 cw(c861.57,2153) P2.2@797.53,2153 ; P2.2@771,2132.47 cw(c771,2082.91) 806.04,2117.96 cw(c841.09,2153) P2.2@791.53,2153 ; P2.2@771,2138.47 cw(c771,2103.4) 795.8,2128.2 cw(c820.6,2153) P2.2@785.53,2153 ; P2.2@771,2153 835.5,2088.5 901.5,2088.5 1136,1854 RN1.5@1136,1808.87 ; RN1.5@1131.16,1825.52 ccw(c1119.48,1837.2) 1136,1837.2 ccw(c1152.52,1837.2) RN1.5@1140.84,1825.52
SY_IN: P2.3 RN1.6 | length 716.3
  Top Layer w6: P2.3@771,2053 911,2053 1104.5,1859.5 RN1.6@1104.5,1808.87 ; P2.3@781.27,2042.73 cw(c806.07,2017.93) 806.07,2053 cw(c806.07,2088.07) P2.3@781.27,2063.27 ; P2.3@785.52,2038.48 cw(c820.56,2003.44) 820.56,2053 cw(c820.56,2102.56) P2.3@785.52,2067.52 ; P2.3@789.76,2034.24 cw(c835.04,1988.96) 835.04,2053 cw(c835.04,2117.04) P2.3@789.76,2071.76 ; RN1.6@1101.06,1826.09 ccw(c1092.74,1834.41) 1104.5,1834.41 ccw(c1116.27,1834.41) RN1.6@1107.95,1826.09
SY_OUT: P2.4 RN1.7 | length 701.9
  Top Layer w6: P2.4@771,1953 842,2024 908,2024 1073.01,1858.99 RN1.7@1073.01,1808.87 ; P2.4@771,1967.53 ccw(c771,2002.6) 795.8,1977.8 ccw(c820.6,1953) P2.4@785.53,1953 ; P2.4@771,1973.53 ccw(c771,2023.09) 806.04,1988.04 ccw(c841.09,1953) P2.4@791.53,1953 ; P2.4@771,1979.53 ccw(c771,2043.57) 816.29,1998.29 ccw(c861.57,1953) P2.4@797.53,1953 ; RN1.7@1069.56,1826.09 ccw(c1061.24,1834.41) 1073.01,1834.41 ccw(c1084.77,1834.41) RN1.7@1076.45,1826.09
SYNC_CLK: R11.1 RN1.4 | length 161.4
  Top Layer w6: R11.1@1127.54,1646.38 ccw(c1107.12,1666.8) 1136,1666.8 ccw(c1164.88,1666.8) R11.1@1144.46,1646.38 ; RN1.4@1131.16,1721.35 cw(c1119.48,1709.67) 1136,1709.67 cw(c1152.52,1709.67) RN1.4@1140.84,1721.35 ; R11.1@1136,1637.92 RN1.4@1136,1728
SYNC_CLKT: R11.2 U1.54 | length 874.2
  Top Layer w6: R11.2@1136,1578.08 1172.08,1542 1579,1542 1674,1447 1674,1262 1686.42,1249.58 U1.54@1686.42,1228.43 ; R11.2@1136.79,1566.12 cw(c1136.79,1539.14) 1155.86,1558.22 ; R11.2@1142.75,1578.08 ccw(c1159.04,1578.08) R11.2@1147.52,1566.56 ; R11.2@1148.75,1578.08 ccw(c1179.52,1578.08) 1157.76,1556.32
SYNC_IN: RN1.3 U1.1 | length 1046.4
  Top Layer w6: RN1.3@1101.06,1720.77 cw(c1092.74,1712.45) 1104.5,1712.45 cw(c1116.27,1712.45) RN1.3@1107.95,1720.77 ; RN1.3@1104.5,1738 1104.5,1551.5 1130.36,1525.64 1176,1525.64 ; 1150,1525.64 1176,1525.64 ; 1469,1525.64 1438,1525.64 ; U1.1@1614.57,1195.95 1588.05,1195.95 1547,1237 1547,1454 1475.36,1525.64 1438,1525.64 ; 1176,1525.64 1438,1525.64
SYNC_OUT: R10.1 RN1.2 | length 160.8
  Top Layer w6: R10.1@1062.54,1646.46 ccw(c1042.12,1666.88) 1071,1666.88 ccw(c1099.88,1666.88) R10.1@1079.46,1646.46 ; R10.1@1071,1638 1071,1735.99 RN1.2@1073.01,1738 ; 1071,1707.61 cw(c1089.62,1707.61) RN1.2@1076.45,1720.77
SYNC_OUTT: R10.2 U1.2 | length 898.4
  Top Layer w6: R10.2@1062.54,1569.7 cw(c1042.12,1549.28) 1071,1549.28 cw(c1099.88,1549.28) R10.2@1079.46,1569.7 ; R10.2@1071,1578.16 1071,1539 1100.71,1509.29 1459.71,1509.29 1528,1441 1528,1236 1587.73,1176.27 U1.2@1614.57,1176.27
UPDATA: P1.8 RN3.5 | length 597.1
  Top Layer w6: P1.8@1397,2056.47 cw(c1397,1992.43) 1442.29,2037.71 cw(c1487.57,2083) P1.8@1423.53,2083 ; P1.8@1397,2062.47 cw(c1397,2012.91) 1432.04,2047.96 cw(c1467.09,2083) P1.8@1417.53,2083 ; P1.8@1397,2068.47 cw(c1397,2033.4) 1421.8,2058.2 cw(c1446.6,2083) P1.8@1411.53,2083 ; P1.8@1397,2083 1549.2,1930.8 RN3.5@1549.2,1808.43 ; RN3.5@1544.37,1825.08 ccw(c1532.69,1836.76) 1549.2,1836.76 ccw(c1565.72,1836.76) RN3.5@1554.04,1825.08
VCC_1V8: C56.1 R17.2 R18.2 R19.2 R20.2 R21.2 R22.2 R23.2 U3.2 U3.4 | length 3667
  Bottom Layer w40: 2229,1888 2238,1879 2238,1692 ; v1(2373.84,1076) 2409,1076 2516,1183 2516,1526 2405,1637 2405,1871 ; 2238,1679.16 ccw(c2256.24,1679.16) 2243.34,1666.26 cw(c2256.24,1679.16) 2238,1679.16
  Bottom Layer w60: 1136,1105 1027,1214 1027,1428 1124.5,1525.5 1485.5,1525.5 1848,1888 2229,1888 2544,1888 2719,1713 v1(2788,1713) v1@2914,1713
  other v1: 1129,1055 1128,1090 2417,1091 2211.49,1671.92 2249,1671.92 2830.67,1715 2873.33,1715 2916,1715
VCC_3V3: C2.2 C54.1 R24.2 U2.2 U2.4 Y1.4 | length 2531.3
  Top Layer w15: Y1.4@2205,128 C2.2@2311,128 v1(2353,128) ; Y1.4@2226.77,116.07 cw(c2255.57,87.27) 2255.57,128 cw(c2255.57,168.73) Y1.4@2226.77,139.93 ; Y1.4@2237.38,105.46 cw(c2291.78,51.06) 2291.78,128 cw(c2291.78,204.94) Y1.4@2237.38,150.54 ; C2.2@2304.94,122.72 ccw(c2292.2,109.99) 2292.2,128 ccw(c2292.2,146.01) C2.2@2304.94,133.28 ; C2.2@2317.06,122.72 cw(c2329.8,109.99) 2329.8,128 cw(c2329.8,146.01) C2.2@2317.06,133.28
  Top Layer w30: 2100,1678 2160,1738 2205,1738 ; 2177,1738 2205,1738 ; 2277,1810 2258,1791 2205,1738
  Bottom Layer w15: v1(2353,128) 2682,457 2682,1523 2511,1694 v1(2511,1789) ; v1@2507,1785 v1(2511,1789) ; v1@2517,1783 v1(2511,1789)
VIN: C53.1 C55.1 J2.2 R16.2 U2.3 U3.3 | length 346.3
  Top Layer w10: v1(3263,2025) 3263,2023 3265,2025 R16.2@3303,2025 ; v1@3267.95,2020.05 cw(c3279.9,2008.1) 3279.9,2025 cw(c3279.9,2041.9) v1@3267.95,2029.95 ; R16.2@3295.17,2017.96 ccw(c3278.17,2000.95) 3278.17,2025 ccw(c3278.17,2049.05) R16.2@3295.17,2032.04
  Bottom Layer w10: v1(3188,1870) 3263,1945 v1(3263,2025) ; v1@3188,1877 ccw(c3188,1893.9) 3199.95,1881.95 ccw(c3211.9,1870) v1@3195,1870 ; v1@3258.05,2020.05 cw(c3246.1,2008.1) 3263,2008.1 cw(c3279.9,2008.1) v1@3267.95,2020.05
  other v1: 3188,1839 3146,1840 3146,1870 2172,2241 2582,2241 2151,2268 2192,2268 2561,2268 2602,2268
pads on no net: T1.2 Y1.1

## Polygon pours and split planes (outlines as drawn)
AGND on Top Layer "GND-TOP" (hatched 90Degree grid 4 track 5, remove dead copper, pour order 1004): -3.95,1 -3.95,2310 cw(c0,2310) -3.8,2311.1 cw(c0,2312.2) -3.95,2312.2 cw(c50,2312.2) 50,2366.16 cw(c50,2362.2) 51.1,2366 cw(c52.2,2362.2) 52.2,2366.16 3487.8,2366.16 cw(c3487.8,2362.2) 3488.9,2366 cw(c3490,2362.2) 3490.14,2366.15 cw(c3488.05,2306.95) 3547.29,2306.95 cw(c3488.05,2306.95) 3547.26,2304.93 3547.26,55.01 cw(c3489.65,54.65) 3547.26,54.65 cw(c3489.65,54.65) 3490.03,-2.95 cw(c3490,1) 3490,-2.95 0,-2.95 cw(c0,1)
CLK_VDD on Top Layer "CLK-VDD" (hatched 90Degree grid 4 track 5, remove dead copper, pour order 1003): 1860,918 1860,833 1872.85,820 1944.03,820 1947,823 1947,853 1939.09,861 1888.67,861 1868.9,881 1868.9,918
AGND on Bottom Layer "GND-TOP" (hatched 90Degree grid 4 track 5, remove dead copper, pour order 1002): -3.95,1 -3.95,2310 cw(c0,2310) -3.8,2311.1 cw(c0,2312.2) -3.95,2312.2 cw(c50,2312.2) 50,2366.16 cw(c50,2362.2) 51.1,2366 cw(c52.2,2362.2) 52.2,2366.16 3487.8,2366.16 cw(c3487.8,2362.2) 3488.9,2366 cw(c3490,2362.2) 3490.14,2366.15 cw(c3488.05,2306.95) 3547.29,2306.95 cw(c3488.05,2306.95) 3547.26,2304.93 3547.26,55.01 cw(c3489.65,54.65) 3547.26,54.65 cw(c3489.65,54.65) 3490.03,-2.95 cw(c3490,1) 3490,-2.95 0,-2.95 cw(c0,1)

## Keep-outs
Keep-Out Layer:
  lines w7.87: 0,51 ccw(c50,51) 50,1 ; 0,2310 0,1 3490,1 ccw(c3489.65,54.65) 3543.31,55 3543.31,2306.69 ; 0,2312.2 cw(c50,2312.2) 50,2362.2 ; 52.2,2362.2 3487.8,2362.2 ; 3490,2362.2 cw(c3488.05,2306.95) 3543.31,2305

## Other copper
Top Layer:
  pour cut-out: 1750,431 1899,431 1903,427 1903,319 1900,316 1851,316 1844,309 1846,307 1846,227 1755,227 1748,234
  pour cut-out: 3275.44,2052.56 3330.56,2052.56 3330,2052 3330,1939 3276.84,1939 3275.44,1937.6
  pour cut-out: 3556,216 3412,216 3347,151 3347,-4 3549,-4 3556,3
  pour cut-out: 3556,2142 3412,2142 3347,2207 3347,2362 3549,2362 3556,2355
  pour cut-out: -5,2142 139,2142 204,2207 204,2362 2,2362 -5,2355
  pour cut-out: 2266,179 2335.2,179 2338.56,175.64 2338.56,130 2268,130 2266,128
  pour cut-out: 2098,887 2098,811.08 2094.46,807.54 2050,852 2050,887
  pour cut-out: 1964,813 2025.45,813 2039.23,826.77 1998.65,867.35 1975.35,867.35 1964,856
  pour cut-out: 1961,765 1961,614.17 1984.25,590.92 1984.25,561.71 1984,561.46 2083.46,561.46 2087,565 2087,683 2029.25,683 2021.25,691 2021.25,744.5 1996.91,768.83 1964.83,768.83
  pour cut-out: 2318,1118.78 2318,1170 2317,1169 2284,1169 2286,1167 2286,1119
  pour cut-out: 2247.44,963.44 2247.44,1019.44 2248.42,1018.46 2360.92,1018.46 2360.92,963.35
  pour cut-out: 2540,1016 2596,1016 2595.02,1015.02 2595.02,902.52 2539.91,902.52
  pour cut-out: 1963,742 2019,742 2018.02,741.02 2018.02,628.52 1962.91,628.52
  pour cut-out: 2032,617 2088,617 2087.02,616.02 2087.02,503.52 2031.91,503.52
  pour cut-out: 1738,170 1777,209 1858,128 1858,127 1857.6,127 1819.31,88.71
  pour cut-out: 1402.6,197.56 1403.16,197 1516,197 1516,143 1515.44,142.44 1402.6,142.44
  pour cut-out: 1299.89,1933.11 1346.78,1980 1500,1980 1549.2,1930.8 1616.2,1930.8 1531,2016 1315,2016 1299,2000
  pour cut-out: 771,2162 741,2162 730,2151 730,1953 752,1931 771,1950
  pour cut-out: 1287,1618 1287,1542 1340,1542 1340,1565
  pour cut-out: 1368,1193 1319,1242 1315,1242 1312,1239 1312,1233 1363,1182 1368,1182
  pour cut-out: 1233,1070 1189.64,1070 1182.08,1077.56 1182.08,1125.08 1183,1126 1226,1126 1233,1119
  pour cut-out: 1230,990 1184,990 1184,933 1229,933 1230,934
  pour cut-out: 1354,875 1420,875 1458,837 1438,837 1355,754
  pour cut-out: 1768,745.3 1768,474 1788,454 1874,454 1884,464 1884,747 1883.59,747.41
  pour cut-out: 2205.22,1859 2205.22,1752.78 2220,1738 2261,1738 2287,1764 2287,1856 2284,1859
  pour cut-out: 2032,1659 2032,1530.22 2044,1518.22 2219.72,1518.22 2282.78,1581.28 2282.78,1729.85 2267.32,1745.32 2167.32,1745.32 2081,1659
  pour cut-out: 1109,1663 1109,1665.48 1164,1665.48 1164,1549 1108,1549
  pour cut-out: 1660,2227.03 1053.71,2227.03 1053.71,2057 1657,2057 1657,2060
  pour cut-out: 3533.92,1192 2387.92,1192 2387.92,1337.86 3532.83,1338.86
  pour cut-out: 3547.08,547 2401.08,547 2401.08,692.86 3545.99,693.86
  pour cut-out: 11.08,703 1157.08,703 1157.08,557.14 12.17,556.14
  pour cut-out: 3,1349 1149,1349 1149,1203.14 4.09,1202.14
  pour cut-out: 1136,752 1312,752 1312,585 1136,585
  pour cut-out: 1145.95,1397 1321.95,1397 1321.95,1230 1145.95,1230
  pour cut-out: 2252,1397 2428,1397 2428,1230 2252,1230
  pour cut-out: 2252,752 2428,752 2428,585 2252,585
  region net VCC_1V8: 2697,1764 2769,1692 2925,1692 2948,1715 2948,1777 2947,1778
  region net VCC_1V8: 2630,1946 2812,1946 2828,1930 2946,1930 2947,1929 2947,1778 2933,1764 2697,1764 2630,1831
  region net VCC_1V8: 2678,2191 2678,2071 2630,2023 2630,1946 2812,1946 2814,1944 2814,1991 2728,2077 2728,2189 2726,2191
  region net VCC_3V3: 2268,2191 2268,2071 2220,2023 2220,1946 2402,1946 2404,1944 2404,1991 2318,2077 2318,2189 2316,2191
  region net VCC_3V3: 2220,1946 2402,1946 2418,1930 2536,1930 2537,1929 2537,1778 2523,1764 2287,1764 2220,1831
  region net VIN: 2223,2104 2223,2286 2214,2295 2127,2295 2118,2286 2118,2136 2150,2104
  region net VIN: 2633,2104 2633,2286 2624,2295 2537,2295 2528,2286 2528,2136 2560,2104
  region net VIN: 3161,2279 3210,2279 3227,2262 3227,1833 3218,1824 3125,1824 3119,1830 3119,2237
  region net VCC_3V3: 2047,1617 2047,1646 2101,1700 2119,1700 2119,1617
  region net VCC_1V8: 936,1012 936,1041 982.84,1087.84 1184.16,1087.84 1184.16,1011.08 1113.16,1011.08 1087.24,1037 1006,1037 982,1013
  region net VCC_1V8: 2383.92,1103.78 2551.83,1104.22 2596,1051 2556,1037 2518,1075 2408.92,1075 2387.42,1053.5 2380.84,1060.08 2380.92,1060.08 2384,1057
  region net VCC_1V8: 2196,1617 2196,1690 2206,1700 2268,1700 2268,1617
  region net AGND: 2521,977 2521,1041 2511,1051 2458,1051 2449,1042 2449,977
  region net VCC_1V8: 2317.84,974 2317.84,1051.08 2380.84,1051.08 2394,1037.92 2394,974
  region net VCC_1V8: 2318,1104 2383,1104 2393.92,1093.08 2393.92,1031.49 2384.92,1022.49 2318,1022.49
  region net VCC_1V8: 2552,977 2552,1041 2562,1051 2596,1051 2596,977
  region net AGND: 1184.16,1149.08 1184.16,1213.08 1174.16,1223.08 1121.16,1223.08 1112.16,1214.08 1112.16,1149.08
  region net CLK_VDD: 2466,947 2584,947 2584,907 2546,869 2466,869
  region net DVDD: 2119,1589 2227,1589 2229,1587 2229,1547 2191,1509 2112,1509 2112,1582
  region net DVDD/IO: 1984,1589 2078,1589 2080,1587 2080,1547 2066,1533 1984,1533
  region net AVDD1: 2290,1158 2259,1158 2259,1075 2236,1052 2236,1022 2290,1022
  region net AVDD3: 1268,883 1278,873 1278,845 1225,845 1225,883
  region net AVDD3: 1214,978 1243,978 1243,845 1225,845 1214,856
  region net AVDD2: 1212,1082 1212,1179 1266,1179 1284,1161 1284,1082
  region net VCC_1V8: 1184.16,947.08 1184.16,1011.08 1174.16,1021.08 1121.16,1021.08 1112.16,1012.08 1112.16,947.08
  region net VCC_1V8: 1008,947 1008,990 977,1021 945,1021 936,1012 936,947
  region net BG_VDD: 976,916 1078,916 1086,908 1086,842 1082,838 998,838 976,860
  region net AVDD0: 2149,722 2183,722 2215,690 2284,690 2284,659 2216,659 2183,626 2149,626
  region net AVDD1: 2069,1061 2069,1159 2013,1159 1996,1142 1996,1103 2038,1061
  region net AVDD0: 2289,1007 2289,907 2253,871 2078,871 2039,910 2062,933 2063,933 2095,901 2230,901 2259,930 2259,1007
  region net AVDD2: 1500,1163 1540,1163 1591.16,1111.84 1591.16,1072.16 1584,1065 1501,1065
  region net DVDD: 1865,1246 1846,1265 1846,1348 1847,1349 1879,1349 1880,1348 1880,1261 1868,1249 1868,1246
  region net DVDD: 1653,1255 1629,1279 1629,1348 1630,1349 1662,1349 1662,1262 1655,1255
  region net DVDD/IO: 1781,1249 1757,1273 1757,1348 1791,1348 1791,1259
  region net AVDD0: 2069,910 2069,1007 2066,1010 1999,1010 1996,1007 1996,953 2039,910
  region net AVDD3: 1398.08,722 1367,722 1335,690 1263.08,690 1263.08,659 1335,659 1368,626 1398.08,626
  region net AVDD2: 1398.95,1273 1366,1273 1334,1305 1263.95,1305 1263.95,1336 1335,1336 1368,1369 1398.95,1369
  region net AVDD1: 2149,1367 2178,1367 2210,1335 2284,1335 2284,1304 2210,1304 2177,1271 2149,1271
  region net AGND: 1560,790 1497,790 1489,782 1489,729 1496,722 1560,722
  region net AGND: 1471,1014 1417,1014 1412,1009 1412,954 1418,948 1471,948
  region net CLK_VDD: 1761,920 1769,920 1769,829 1760,820 1723,820 1723,850 1761,888
  region net BG_VDD: 1722,918 1722,901 1721,896 1721,883 1705,867 1666,867 1659,860 1659,819 1710,819 1712,821 1712,850 1730,868 1730,918
  region net AVDD3: 1628,1004 1592,1004 1582,1014 1501,1014 1501,947 1526,947 1590,994 1628,994
Bottom Layer:
  rectangle net AGND: 1664,964.42 1889,1175
  pour cut-out: 2034,1547 2102,1547 2125,1524 2120,1519 2034,1519
  pour cut-out: 1327,2190 1327,2080 1304,2057 1068.64,2057 1054.64,2071 1054.64,2140.64 1097,2183 1100,2180 1326,2180
  pour cut-out: 2060.62,1489.62 1979.62,1489.62 1973,1483 1973,1432 2003,1432
  pour cut-out: 2580,1571 2580,1632 2608.84,1632 2608.84,1542.16
  pour cut-out: 2682,566 2605,566 2605,592 2682,592
  region net VCC_1V8: 2192,1689 2200,1697 2263,1697 2273,1687 2273,1645 2262,1634 2199,1634 2192,1641
  region net VIN: 3196,1883 3121,1883 3094.57,1856.57 3040.43,1856.57 2840,2057 2840,2236 2781,2295 2124,2295 2124,2217 2141,2200 2715,2200 2737,2178 2737,2030 2986,1781 3174,1781 3210,1817 3210,1869
  region net VCC_1V8: 1109,1037 1100,1046 1100,1118 1116,1133 1150,1133 1179,1104 1179,1045 1171,1037

## Silkscreen, mask and mechanical layers (free items; w line width, h text height)
Top Overlay:
  lines w5: 3418,1938 3444,1938 ; 3431,1925 3431,1953
  lines w7.87: 1131,1845 1131,1944 1132,1944 ; 1277,1845 1278,1845 1278,1944 ; 1430,1845 1430,1944 ; 1601,1944 1601,1845 1603,1845 ; 1693,1845 1698,1845 1698,1944 ; 1794,1845 1795,1845 1795,1944 ; 2115,1291 2115,1259 2131,1259 ; 2977,1962 2977,2034 2999,2034 ; 954,1845 954,1944 1888,1944 1888,1845 954,1845
  text "GND" at 608,2234 h25
  text "3V3" at 2228,2225 h80
  text "1V8" at 2633,2225 h80
  text "SY_CLK" at 566,2143 h25
  text "SY_IN" at 595.16,2041 h25
  text "SY_OUT" at 566,1939 h25
  text "SDIO2" at 992,1906 h25
  text "SDIO1" at 1157,1906 h25
  text "SDIO0" at 1294,1906 h25
  text "P3" at 1492,1906 h25
  text "P2" at 1621,1906 h25
  text "P1" at 1716,1906 h25
  text "P0" at 1808,1906 h25
  text "SDIO3" at 993,1860 h25
  text "SCLK" at 1157,1860 h25
  text "CS" at 1294,1860 h25
  text "UPDATA" at 1442,1860 h25
  text "RST" at 1621,1860 h25
  text "PDC" at 1717,1860 h25
  text "GND" at 1808,1860 h25
  text "CH2" at 47,984 h80
  text "CH1" at 3289,984 h80
  text "CH3" at 47,340 h80
  text "CH0" at 3289,340 h80
  text "AD9959" at 2448,165 h250
  text "REF IN" at 851,161 h30
  text "With 200MHz LOW PASS FILTER" at 2427,67 h60
Bottom Solder:
  rectangle: 1630,933 1935,1211

## Text inside footprints (layer, text, board x,y; h text height)
J2: Top Overlay "V+" at 3152,2121 h60; Top Overlay "GND" at 2947,2121 h60